# EAGLE board LNA_V2 (EAGLE 7.5.0)
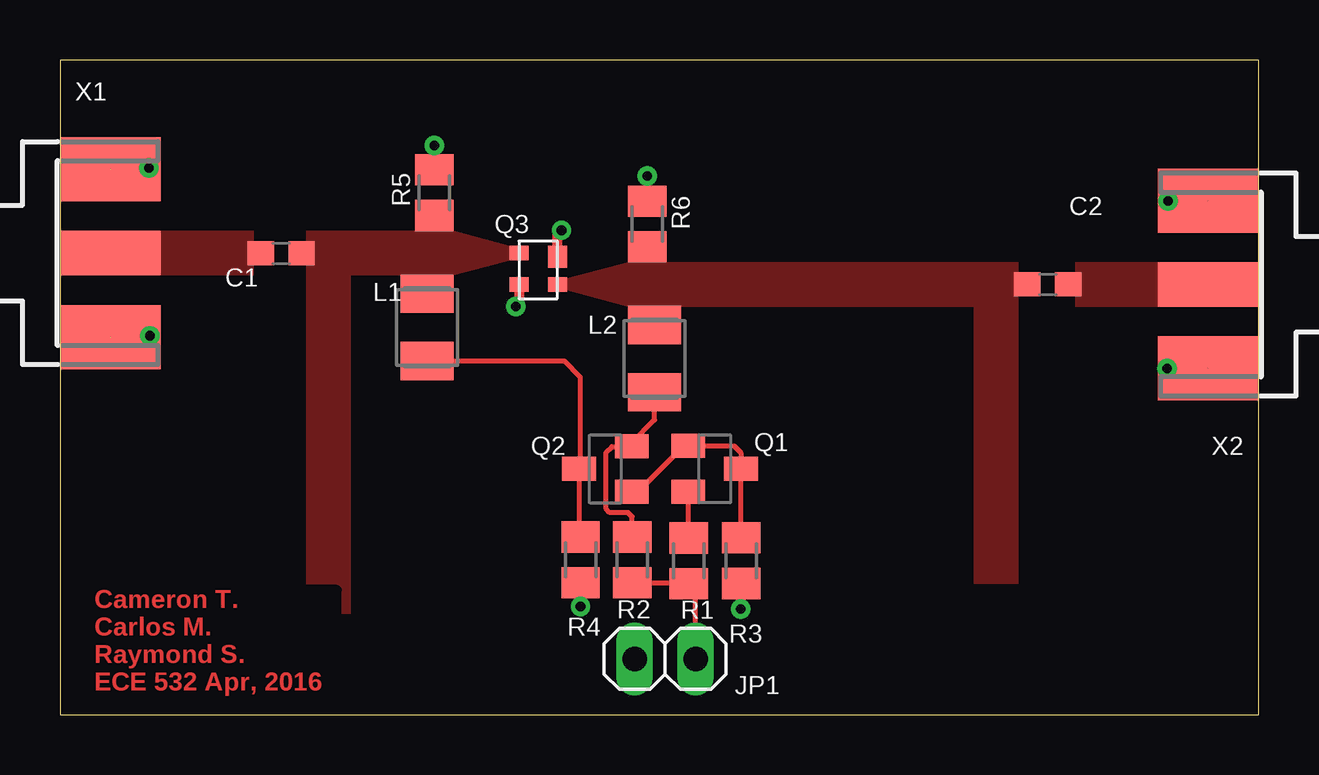
[diagram p0: board, top side]
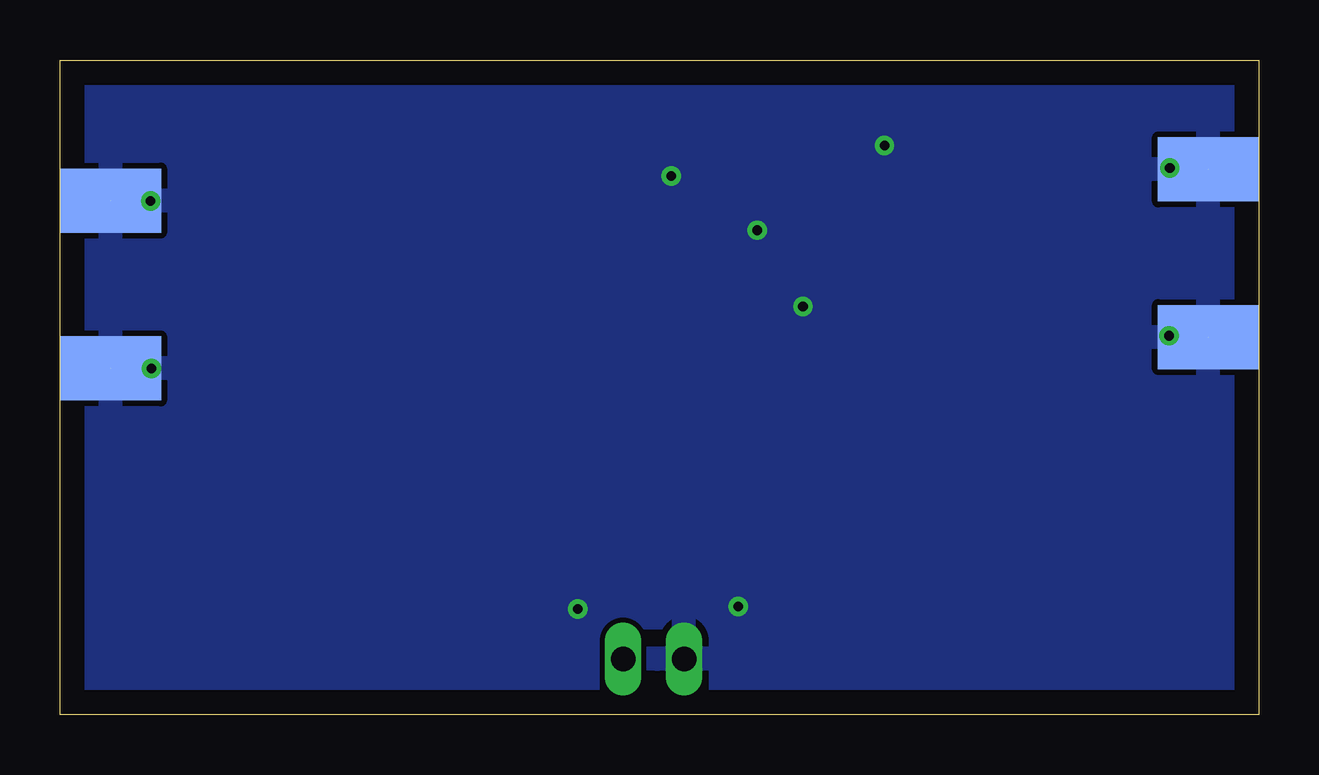
[diagram p1: board, bottom side, seen from below]

Size 49.97 x 27.29 mm. Coordinates in mm from the lower left corner, seen from the top.
Outline: 0,0 49.97,0 49.97,27.29 0,27.29 0,0
Copper layers (1*16): Top 0.035mm / dielectric 1.5mm / Bottom 0.035mm
Design rules "default": minimum track width 10mil, minimum drill 24mil, track to track 8mil, track to pad 8mil, pad to pad 8mil, via to via 8mil, smd to smd 8mil, copper to edge 40mil, drill to drill 8mil, minimum pad ring 10mil, minimum via ring 8mil, stop-mask expansion 4mil, vias tented up to drill 0mil, thermal gap 10mil

## Footprints (pad centres in the part's own frame; a part is rotated, then mirrored left to right if it is on the bottom)
C0603 = smd 1.1 x 1: 1 -0.85,0; 2 0.85,0
1X02 = drill 1.016 long: 1 -1.27,0; 2 1.27,0
L3225M = smd 1.6 x 2.2: 1 -1.4,0; 2 1.4,0
SOT23-BEC = smd 1 x 1.4: B -0.95,-1.1; C 0,1.1; E 0.95,-1.1
SOT-343 = smd 0.6 x 0.8: 1 1.3,1.6; 3 0,0; 4 1.3,0 | smd 0.9 x 0.8: 2 0.15,1.6
M0805 = smd 1.3 x 1.6: 1 -0.95,0; 2 0.95,0
J502-ND-142-0711-821/826 = smd 4.191 x 1.85: 1 2.115,0 | smd 4.191 x 2.667: G@1 2.115,3.495; G@2 2.115,-3.495 | smd 4.191 x 2.667 bottom: G@3 2.115,3.495; G@4 2.115,-3.495

## Placement (x,y rotation side)
C1  [C0603]  9.22,19.24 180 top
C2  [C0603]  41.17,17.94 180 top
JP1  [1X02]  25.23,2.33 180 top
L1  820nH  [L3225M]  15.3,16.15 90 top
L2  820nH  [L3225M]  24.78,14.84 90 top
Q1  MMBT3906LT1SMD  [SOT23-BEC]  27.29,10.26 270 top
Q2  MMBT3906LT1SMD  [SOT23-BEC]  22.73,10.25 90 top
Q3  SAV-541+  [SOT-343]  19.13,19.24 270 top
R1  3k  [M0805]  26.2,6.42 270 top
R2  15  [M0805]  23.85,6.46 270 top
R3  4320  [M0805]  28.39,6.43 270 top
R4  4320  [M0805]  21.7,6.46 270 top
R5  50  [M0805]  15.6,21.76 90 top
R6  100  [M0805]  24.47,20.46 90 top
X1  SMA-142-0711-821/826  [J502-ND-142-0711-821/826]  -0.01,19.24 0 top
X2  SMA-142-0711-821/826  [J502-ND-142-0711-821/826]  49.96,17.94 180 top

## Library data of the parts
C1 C2 R1-R6 = rcl
JP1 = pinhead
L1 L2 = resistor
Q1 Q2 = transistor-pnp
Q3 = ECE532_Parts
X1 X2 = con-coax; MF: JOHNSON COMPONENTS; MPN: 142-0711-821; OC_FARNELL: 1019328; OC_NEWARK: 16F3627

## Nets
+3.3V: JP1.1 R1.2 R2.2
GND: JP1.2 Q3.2 Q3.4 R3.2 R4.2 R5.2 R6.2 X1.G@1 X1.G@2 X1.G@3 X1.G@4 X2.G@1 X2.G@2 X2.G@3 X2.G@4
INPUT: C1.1 L1.2 Q3.3 R5.1
ISO_INPUT: C1.2 X1.1
ISO_OUTPUT: C2.1 X2.1
N$1: Q1.B Q1.C Q2.B R3.1
N$4: Q1.E R1.1
OUTPUT: C2.2 L2.2 Q3.1 R6.1
VD: L2.1 Q2.E R2.1
VG: L1.1 Q2.C R4.1

## Tracks (layer width: path | path; a pad name or v marks a point on that pad's centre or on a via)
+3.3V
  Top 0.203: R2.2 26.16,5.51 R1.2 26.5,5.18 JP1.1
GND  (via drill 0.4)  (4 unrouted)
  Top 0.203: v15.6,23.73 R5.2 | v24.48,22.46 24.48,21.45 R6.2
  Top 0.406: Q3.2 20.73,20.02 v20.91,20.19 | Q3.4 19.14,17.15 v19,17.02 | v28.38,4.42 28.38,5.26 R3.2 | v21.7,4.52 R4.2
  other vias: 3.71,22.78 3.75,15.8 46.19,21.41 46.15,14.44
  pour Bottom: 60.78,-1.42 67.18,71.46 0,73.66 0,-1.27
INPUT
  pour Top (no thermals): 10.26,20.17 16.4,20.17 16.4,18.32 10.26,18.32
  pour Top (no thermals): 18.94,19.5 16.4,20.17 16.4,18.32 18.94,18.99
ISO_INPUT
  pour Top (no thermals): 8.08,18.31 4.16,18.31 4.16,20.16 8.08,20.16
ISO_OUTPUT
  pour Top (no thermals): 42.32,18.86 45.77,18.86 45.77,17.01 42.32,17.01
N$1
  Top 0.203: Q2.B 24.09,9.3 25.68,10.89 25.87,10.89 Q1.B 28.1,11.21 28.38,10.92 Q1.C R3.1
N$4
  Top 0.203: Q1.E 26.19,7.39 R1.1
N$6
  pour Top (no thermals): 12.11,4.22 12.11,18.32 10.26,18.32 10.26,4.22
N$8
  pour Top (no thermals): 39.94,5.45 39.94,17.01 38.1,17.01 38.1,5.45
OUTPUT
  pour Top (no thermals): 23.67,17.01 39.94,17.01 39.94,18.86 23.67,18.86
  pour Top (no thermals): 21.13,17.69 23.67,17.02 23.67,18.86 21.13,18.19
VD
  Top 0.203: R2.1 23.85,8.26 23.68,8.43 22.92,8.43 22.76,8.58 22.76,10.94 23,11.18 23.82,11.18 Q2.E 23.83,11.35 24.78,12.3 L2.1
VG
  Top 0.203: L1.1 21.01,14.75 21.68,14.08 21.68,10.3 Q2.C 21.63,7.47 R4.1

## Text on the board
Top: Cameron T. / Carlos M. / Raymond S. / ECE 532 Apr, 2016